# EAGLE board rectifier (EAGLE 6.5.0)
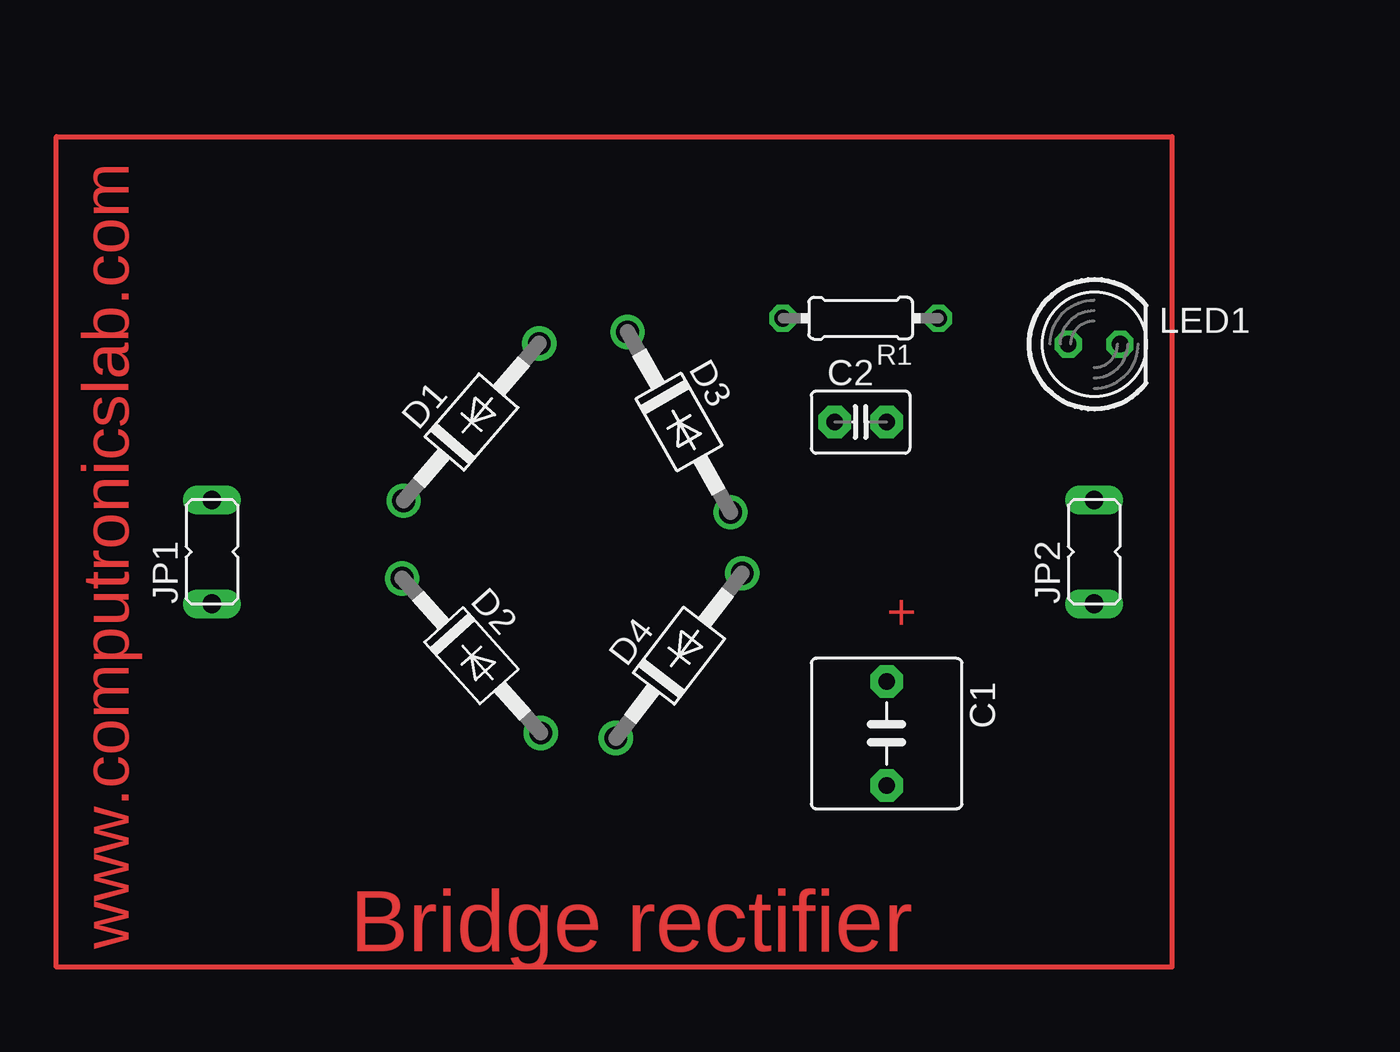
[diagram p0: board, top side]
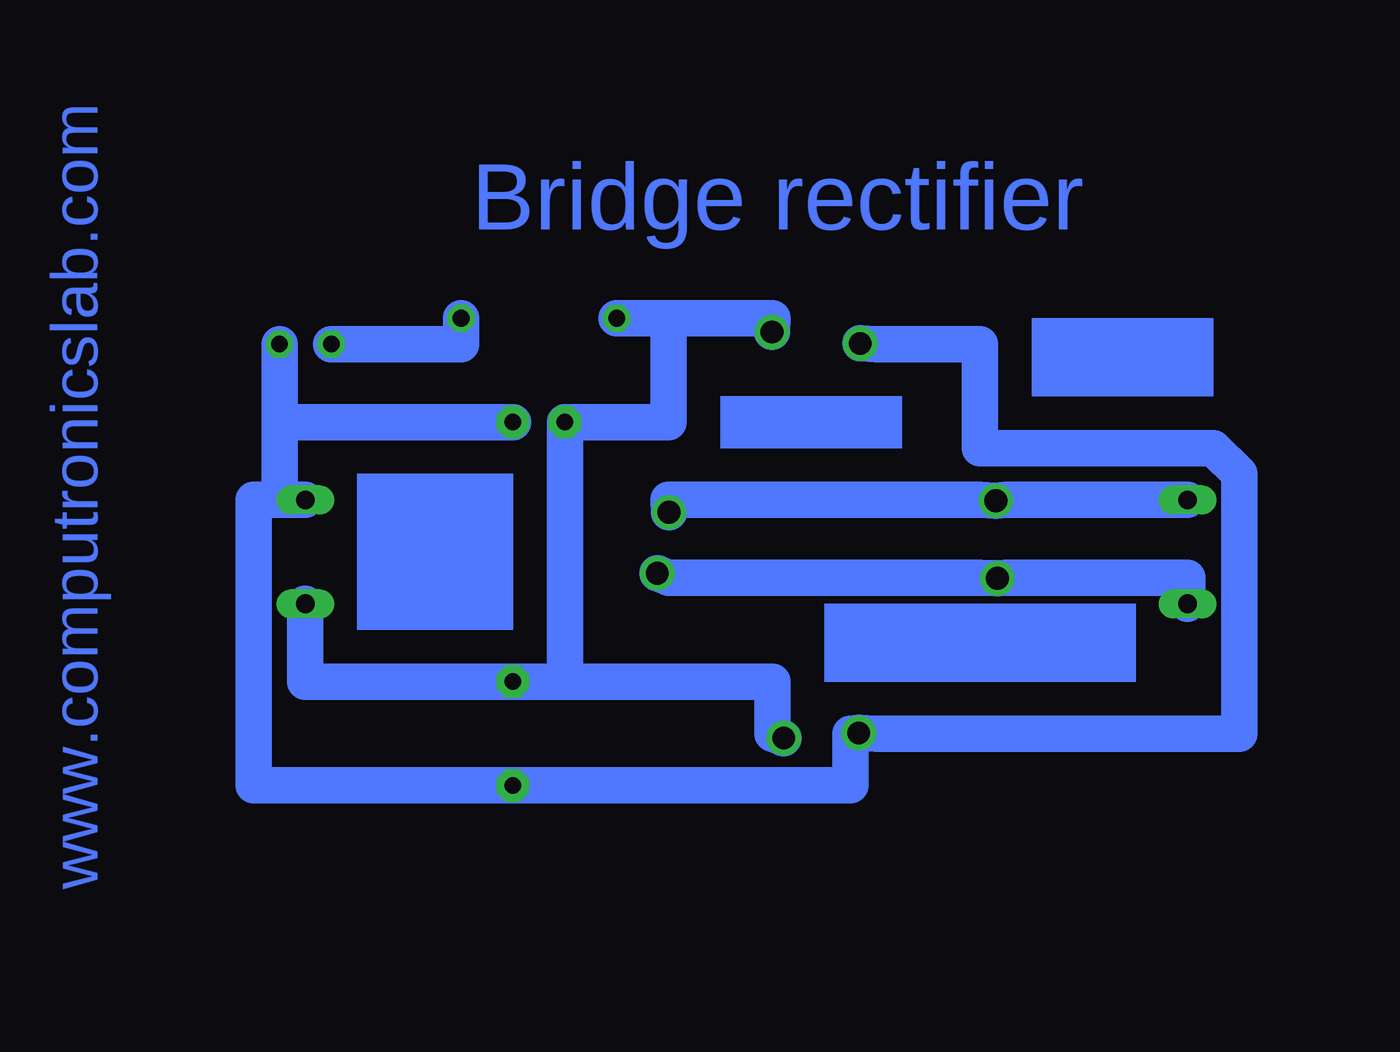
[diagram p1: board, bottom side, seen from below]

No outline drawn. Coordinates in mm, seen from the top.
Copper layers (1*16): Top 0.035mm / dielectric 1.5mm / Bottom 0.035mm
Design rules "default *": minimum track width 70mil, minimum drill 24mil, track to track 8mil, track to pad 8mil, pad to pad 8mil, via to via 8mil, smd to smd 8mil, copper to edge 40mil, drill to drill 8mil, minimum pad ring 10mil, minimum via ring 8mil, stop-mask expansion 4mil, vias tented up to drill 0mil, thermal gap 10mil

## Footprints (pad centres in the part's own frame; a part is rotated, then mirrored left to right if it is on the bottom)
C5B7.2 = drill 0.813 pad 1.6 octagon: 1 -2.54,0; 2 2.54,0
C2.5-3 = drill 0.813 pad 1.6 octagon: 1 -1.27,0; 2 1.27,0
DO41-10 = drill 1.118: A 5.08,0; C -5.08,0
JP1 = drill 0.914 long: 1 0,-2.54; 2 0,2.54
LED5MM = drill 0.813 octagon: A -1.27,0; K 1.27,0
0204/7 = drill 0.813 octagon: 1 -3.81,0; 2 3.81,0

## Placement (x,y rotation side)
C1  220uf  [C5B7.2]  45.72,49.53 270 top
C2  0.1uf  [C2.5-3]  44.45,64.77 0 top
D1  1N4007  [DO41-10]  25.4,64.77 49.2 top
D2  1N4007  [DO41-10]  25.4,53.34 311.9 top
D3  1N4007  [DO41-10]  35.56,64.77 299.8 top
D4  1N4007  [DO41-10]  35.56,53.34 52.5 top
JP1  transformer  [JP1]  12.7,58.42 0 top
JP2  output  [JP1]  55.88,58.42 0 top
LED1  5mm  [LED5MM]  55.88,68.58 0 top
R1  [0204/7]  44.45,69.85 180 top

## Library data of the parts
C1 C2 = capacitor-wima
D1-D4 = diode
JP1 JP2 = jumper
LED1 = led
R1 = eagle-ltspice; SPICEMODEL: NONE; SPICEPREFIX: R

## Nets
N$1: C1.2 C2.2 D1.A D2.A JP2.2 LED1.K
N$2: C1.1 C2.1 D3.C D4.C JP2.1 R1.2
N$3: D2.C D4.A JP1.1
N$4: D1.C D3.A JP1.2
N$6: LED1.A R1.1

## Tracks (layer width: path | path; a pad name or v marks a point on that pad's centre or on a via)
N$1
  Bottom 1.778: 57.15,64.77 57.15,60.96 JP2.2 58.42,60.96 58.42,58.42 58.42,46.99 C1.2 31.75,46.99 29.21,46.99 29.21,48.26 29.21,49.53 D2.A 27.94,49.53 10.16,49.53 10.16,62.23 11.43,63.5 22.86,63.5 22.86,68.58 27.94,68.58 D1.A | 57.15,64.77 LED1.K | 57.15,64.77 C2.2
N$2
  Bottom 1.778: 38.1,69.85 33.02,69.85 D3.C | 38.1,69.85 R1.2 | 38.1,69.85 38.1,64.77 C2.1 43.18,52.07 | JP2.1 55.88,52.07 52.07,52.07 C1.1 43.18,52.07 | 43.18,52.07 35.56,52.07 33.02,52.07 33.02,49.53 D4.C
N$3
  Bottom 1.778: JP1.1 12.7,57.15 21.59,57.15 D2.C 22.86,57.15 38.1,57.15 D4.A
N$4
  Bottom 1.778: JP1.2 21.59,60.96 D1.C 22.86,60.96 38.1,60.96 D3.A
N$5
  Top 0.254: 5.08,78.74 59.69,78.74 59.69,38.1 5.08,38.1 5.08,78.74
N$6
  Bottom 1.778: R1.1 48.26,68.58 49.53,68.58 LED1.A
(copper drawn outside any net)
  shapes: Bottom area x4

## Text on the board
Top: www.computronicslab.com | + | Bridge rectifier
Bottom: Bridge rectifier | www.computronicslab.com